# Altium PCB qol56-top(1).PcbDoc
Units mm, origin at the board's own origin, x right, y up, seen from the top; angles counter-clockwise.
Board outline 272 x 86 mm, 2 copper layers (F.Cu, B.Cu); 8 components, 0 nets, 8 pads, 0 vias.
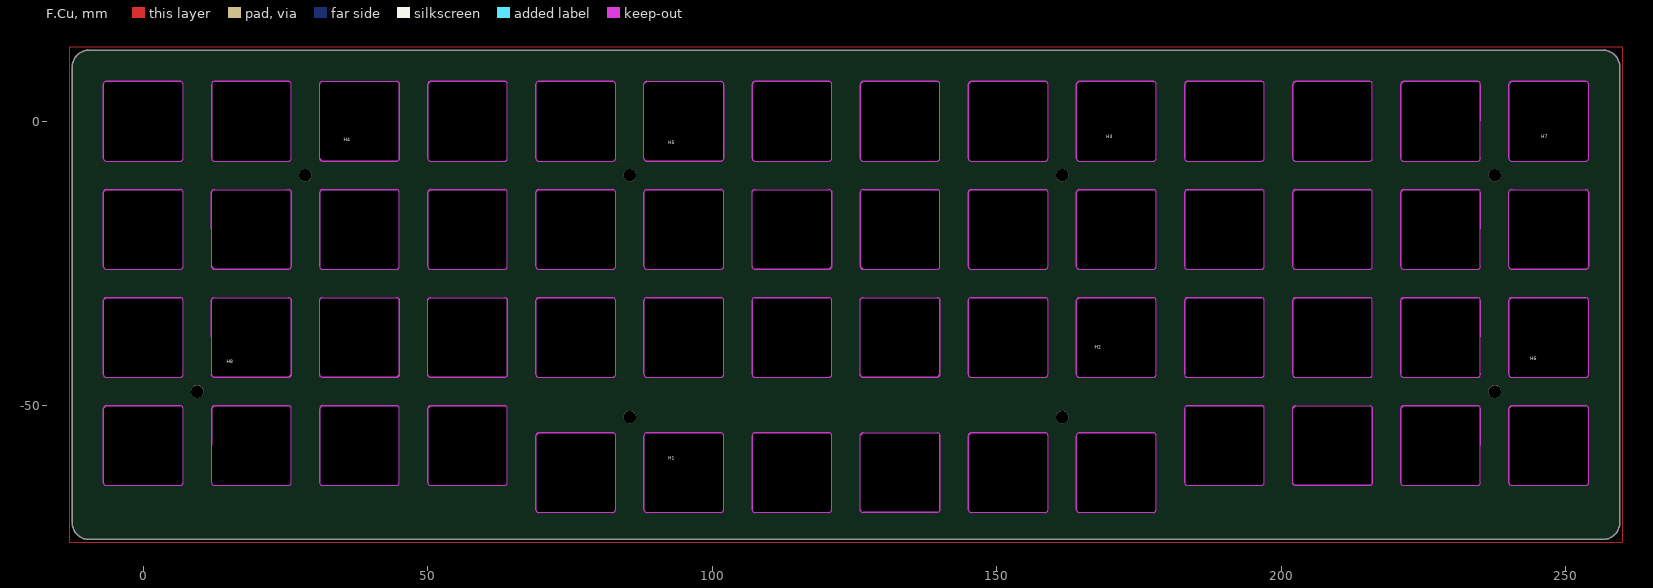
[diagram p0: F.Cu view]
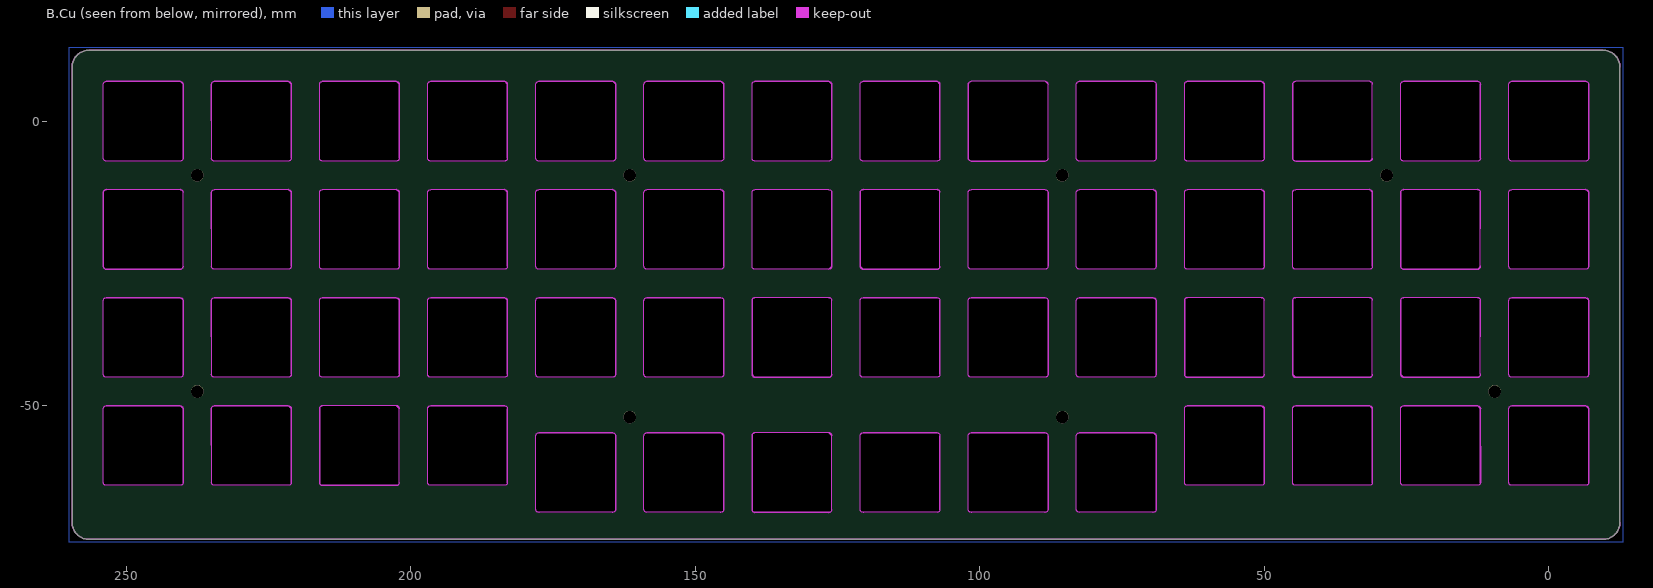
[diagram p1: B.Cu view, seen from below]

## Layer stack, top to bottom
F.Mask: solder mask 0.0102, Solder Resist, Dk 3.5
F.Cu: signal copper 0.0356
Dielectric 1: dielectric 0.32, FR-4, Dk 4.8
B.Cu: signal copper 0.0356
B.Mask: solder mask 0.0102, Solder Resist, Dk 3.5

## Board outline
259.5,-70.5 cw(c256.5,-70.5) 256.5,-73.5 -9.5,-73.5 cw(c-9.5,-70.5) -12.5,-70.5 -12.5,9.5 cw(c-9.5,9.5) -9.5,12.5 256.5,12.5 cw(c256.5,9.5) 259.5,9.5 259.5,-70.5
cut-out: 164.5,-30.99 164.305,-31.029 164.14,-31.14 164.029,-31.305 163.99,-31.5 164,-31.5 163.99,-44.5 164.029,-44.695 164.14,-44.86 164.305,-44.971 164.5,-45.01 164.5,-45 177.5,-45.01 177.695,-44.971 177.86,-44.86 177.971,-44.695 178.01,-44.5 178,-44.5 178.01,-31.5 177.971,-31.305 177.86,-31.14 177.695,-31.029 177.5,-30.99 177.5,-31 164.5,-30.99 164.305,-31.029 164.14,-31.14 164.029,-31.305 163.99,-31.5 164,-31.5
cut-out: 183.5,-30.99 183.305,-31.029 183.14,-31.14 183.029,-31.305 182.99,-31.5 183,-31.5 182.99,-44.5 183.029,-44.695 183.14,-44.86 183.305,-44.971 183.5,-45.01 183.5,-45 196.5,-45.01 196.695,-44.971 196.86,-44.86 196.971,-44.695 197.01,-44.5 197,-44.5 197.01,-31.5 196.971,-31.305 196.86,-31.14 196.695,-31.029 196.5,-30.99 196.5,-31 183.5,-30.99 183.305,-31.029 183.14,-31.14 183.029,-31.305 182.99,-31.5 183,-31.5
cut-out: -6.5,-49.99 -6.695,-50.029 -6.86,-50.14 -6.971,-50.305 -7.01,-50.5 -7,-50.5 -7.01,-63.5 -6.971,-63.695 -6.86,-63.86 -6.695,-63.971 -6.5,-64.01 -6.5,-64 6.5,-64.01 6.695,-63.971 6.86,-63.86 6.971,-63.695 7.01,-63.5 7,-63.5 7.01,-50.5 6.971,-50.305 6.86,-50.14 6.695,-50.029 6.5,-49.99 6.5,-50 -6.5,-49.99 -6.695,-50.029 -6.86,-50.14 -6.971,-50.305 -7.01,-50.5 -7,-50.5
cut-out: 202.5,-30.99 202.305,-31.029 202.14,-31.14 202.029,-31.305 201.99,-31.5 202,-31.5 201.99,-44.5 202.029,-44.695 202.14,-44.86 202.305,-44.971 202.5,-45.01 202.5,-45 215.5,-45.01 215.695,-44.971 215.86,-44.86 215.971,-44.695 216.01,-44.5 216,-44.5 216.01,-31.5 215.971,-31.305 215.86,-31.14 215.695,-31.029 215.5,-30.99 215.5,-31 202.5,-30.99 202.305,-31.029 202.14,-31.14 202.029,-31.305 201.99,-31.5 202,-31.5
cut-out: 221.5,-30.99 221.305,-31.029 221.14,-31.14 221.029,-31.305 220.99,-31.5 221,-31.5 220.99,-44.5 221.029,-44.695 221.14,-44.86 221.305,-44.971 221.5,-45.01 221.5,-45 234.5,-45.01 234.695,-44.971 234.86,-44.86 234.971,-44.695 235.01,-44.5 235,-44.5 235.01,-31.5 234.971,-31.305 234.86,-31.14 234.695,-31.029 234.5,-30.99 234.5,-31 221.5,-30.99 221.305,-31.029 221.14,-31.14 221.029,-31.305 220.99,-31.5 221,-31.5
cut-out: 240.5,-30.99 240.305,-31.029 240.14,-31.14 240.029,-31.305 239.99,-31.5 240,-31.5 239.99,-44.5 240.029,-44.695 240.14,-44.86 240.305,-44.971 240.5,-45.01 240.5,-45 253.5,-45.01 253.695,-44.971 253.86,-44.86 253.971,-44.695 254.01,-44.5 254,-44.5 254.01,-31.5 253.971,-31.305 253.86,-31.14 253.695,-31.029 253.5,-30.99 253.5,-31 240.5,-30.99 240.305,-31.029 240.14,-31.14 240.029,-31.305 239.99,-31.5 240,-31.5
cut-out: 221.5,-49.99 221.305,-50.029 221.14,-50.14 221.029,-50.305 220.99,-50.5 221,-50.5 220.99,-63.5 221.029,-63.695 221.14,-63.86 221.305,-63.971 221.5,-64.01 221.5,-64 234.5,-64.01 234.695,-63.971 234.86,-63.86 234.971,-63.695 235.01,-63.5 235,-63.5 235.01,-50.5 234.971,-50.305 234.86,-50.14 234.695,-50.029 234.5,-49.99 234.5,-50 221.5,-49.99 221.305,-50.029 221.14,-50.14 221.029,-50.305 220.99,-50.5 221,-50.5
cut-out: 240.5,-49.99 240.305,-50.029 240.14,-50.14 240.029,-50.305 239.99,-50.5 240,-50.5 239.99,-63.5 240.029,-63.695 240.14,-63.86 240.305,-63.971 240.5,-64.01 240.5,-64 253.5,-64.01 253.695,-63.971 253.86,-63.86 253.971,-63.695 254.01,-63.5 254,-63.5 254.01,-50.5 253.971,-50.305 253.86,-50.14 253.695,-50.029 253.5,-49.99 253.5,-50 240.5,-49.99 240.305,-50.029 240.14,-50.14 240.029,-50.305 239.99,-50.5 240,-50.5
cut-out: 201.99,-50.5 202.029,-50.305 202.14,-50.14 202.305,-50.029 202.5,-49.99 202.5,-50 215.5,-50 215.5,-49.99 215.695,-50.029 215.86,-50.14 215.971,-50.305 216.01,-50.5 216,-50.5 216.01,-63.5 215.971,-63.695 215.86,-63.86 215.695,-63.971 215.5,-64.01 215.5,-64 202.5,-64 202.5,-64.01 202.305,-63.971 202.14,-63.86 202.029,-63.695 201.99,-63.5 202,-63.5 201.99,-50.5 202.029,-50.305 202.14,-50.14 202.305,-50.029 202.5,-49.99 202.5,-50
cut-out: 140.01,-44.5 139.971,-44.695 139.86,-44.86 139.695,-44.971 139.5,-45.01 139.5,-45 126.5,-45 126.5,-45.01 126.305,-44.971 126.14,-44.86 126.029,-44.695 125.99,-44.5 126,-44.5 126,-31.5 125.99,-31.5 126.029,-31.305 126.14,-31.14 126.305,-31.029 126.5,-30.99 126.5,-31 139.5,-31 139.5,-30.99 139.695,-31.029 139.86,-31.14 139.971,-31.305 140.01,-31.5 140,-31.5 140.01,-44.5 139.971,-44.695 139.86,-44.86 139.695,-44.971 139.5,-45.01 139.5,-45
cut-out: 63.5,-30.99 63.695,-31.029 63.86,-31.14 63.971,-31.305 64.01,-31.5 64,-31.5 64.01,-44.5 63.971,-44.695 63.86,-44.86 63.695,-44.971 63.5,-45.01 50.5,-45 50.5,-45.01 50.305,-44.971 50.14,-44.86 50.029,-44.695 49.99,-44.5 50,-44.5 50,-31.5 49.99,-31.5 50.029,-31.305 50.14,-31.14 50.305,-31.029 50.5,-30.99 50.5,-31 63.5,-31
cut-out: 120.5,-31 107.5,-30.99 107.305,-31.029 107.14,-31.14 107.029,-31.305 106.99,-31.5 107,-44.5 106.99,-44.5 107.029,-44.695 107.14,-44.86 107.305,-44.971 107.5,-45.01 107.5,-45 120.5,-45 120.5,-45.01 120.695,-44.971 120.86,-44.86 120.971,-44.695 121.01,-44.5 121,-44.5 121,-31.5 121.01,-31.5 120.971,-31.305 120.86,-31.14 120.695,-31.029 120.5,-30.99
cut-out: 69.5,-30.99 69.305,-31.029 69.14,-31.14 69.029,-31.305 68.99,-31.5 69,-31.5 68.99,-44.5 69.029,-44.695 69.14,-44.86 69.305,-44.971 69.5,-45.01 69.5,-45 82.5,-45.01 82.695,-44.971 82.86,-44.86 82.971,-44.695 83.01,-44.5 83,-44.5 83.01,-31.5 82.971,-31.305 82.86,-31.14 82.695,-31.029 82.5,-30.99 82.5,-31 69.5,-30.99 69.305,-31.029 69.14,-31.14 69.029,-31.305 68.99,-31.5 69,-31.5
cut-out: 88.5,-45 101.5,-45 101.5,-45.01 101.695,-44.971 101.86,-44.86 101.971,-44.695 102.01,-44.5 102,-44.5 102.01,-31.5 101.971,-31.305 101.86,-31.14 101.695,-31.029 101.5,-30.99 101.5,-31 88.5,-30.99 88.305,-31.029 88.14,-31.14 88.029,-31.305 87.99,-31.5 88,-44.5 87.99,-44.5 88.029,-44.695 88.14,-44.86 88.305,-44.971 88.5,-45.01
cut-out: 197,-63.5 197.01,-50.5 196.971,-50.305 196.86,-50.14 196.695,-50.029 196.5,-49.99 196.5,-50 183.5,-49.99 183.305,-50.029 183.14,-50.14 183.029,-50.305 182.99,-50.5 183,-50.5 182.99,-63.5 183.029,-63.695 183.14,-63.86 183.305,-63.971 183.5,-64.01 196.5,-64 196.5,-64.01 196.695,-63.971 196.86,-63.86 196.971,-63.695 197.01,-63.5
cut-out: 159,-44.5 159.01,-31.5 158.971,-31.305 158.86,-31.14 158.695,-31.029 158.5,-30.99 158.5,-31 145.5,-30.99 145.305,-31.029 145.14,-31.14 145.029,-31.305 144.99,-31.5 145,-31.5 144.99,-44.5 145.029,-44.695 145.14,-44.86 145.305,-44.971 145.5,-45.01 158.5,-45 158.5,-45.01 158.695,-44.971 158.86,-44.86 158.971,-44.695 159.01,-44.5
cut-out: 12.5,-49.99 12.305,-50.029 12.14,-50.14 12.029,-50.305 11.99,-50.5 12,-50.5 11.99,-63.5 12.029,-63.695 12.14,-63.86 12.305,-63.971 12.5,-64.01 12.5,-64 25.5,-64.01 25.695,-63.971 25.86,-63.86 25.971,-63.695 26.01,-63.5 26,-63.5 26.01,-50.5 25.971,-50.305 25.86,-50.14 25.695,-50.029 25.5,-49.99 25.5,-50 12.5,-49.99 12.305,-50.029 12.14,-50.14 12.029,-50.305 11.99,-50.5 12,-50.5
cut-out: 31.5,-49.99 31.305,-50.029 31.14,-50.14 31.029,-50.305 30.99,-50.5 31,-50.5 30.99,-63.5 31.029,-63.695 31.14,-63.86 31.305,-63.971 31.5,-64.01 31.5,-64 44.5,-64.01 44.695,-63.971 44.86,-63.86 44.971,-63.695 45.01,-63.5 45,-63.5 45.01,-50.5 44.971,-50.305 44.86,-50.14 44.695,-50.029 44.5,-49.99 44.5,-50 31.5,-49.99 31.305,-50.029 31.14,-50.14 31.029,-50.305 30.99,-50.5 31,-50.5
cut-out: 50.5,-49.99 50.305,-50.029 50.14,-50.14 50.029,-50.305 49.99,-50.5 50,-50.5 49.99,-63.5 50.029,-63.695 50.14,-63.86 50.305,-63.971 50.5,-64.01 50.5,-64 63.5,-64.01 63.695,-63.971 63.86,-63.86 63.971,-63.695 64.01,-63.5 64,-63.5 64.01,-50.5 63.971,-50.305 63.86,-50.14 63.695,-50.029 63.5,-49.99 63.5,-50 50.5,-49.99 50.305,-50.029 50.14,-50.14 50.029,-50.305 49.99,-50.5 50,-50.5
cut-out: -6.5,-30.99 -6.695,-31.029 -6.86,-31.14 -6.971,-31.305 -7.01,-31.5 -7,-31.5 -7.01,-44.5 -6.971,-44.695 -6.86,-44.86 -6.695,-44.971 -6.5,-45.01 -6.5,-45 6.5,-45.01 6.695,-44.971 6.86,-44.86 6.971,-44.695 7.01,-44.5 7,-44.5 7.01,-31.5 6.971,-31.305 6.86,-31.14 6.695,-31.029 6.5,-30.99 6.5,-31 -6.5,-30.99 -6.695,-31.029 -6.86,-31.14 -6.971,-31.305 -7.01,-31.5 -7,-31.5
cut-out: 45.01,-44.5 44.971,-44.695 44.86,-44.86 44.695,-44.971 44.5,-45.01 44.5,-45 31.5,-45 31.5,-45.01 31.305,-44.971 31.14,-44.86 31.029,-44.695 30.99,-44.5 31,-44.5 31,-31.5 30.99,-31.5 31.029,-31.305 31.14,-31.14 31.305,-31.029 31.5,-30.99 31.5,-31 44.5,-31 44.5,-30.99 44.695,-31.029 44.86,-31.14 44.971,-31.305 45.01,-31.5 45,-31.5 45.01,-44.5 44.971,-44.695 44.86,-44.86 44.695,-44.971 44.5,-45.01 44.5,-45
cut-out: 145.5,-54.74 145.305,-54.779 145.14,-54.89 145.029,-55.055 144.99,-55.25 145,-55.25 144.99,-68.25 145.029,-68.445 145.14,-68.61 145.305,-68.721 145.5,-68.76 145.5,-68.75 158.5,-68.76 158.695,-68.721 158.86,-68.61 158.971,-68.445 159.01,-68.25 159,-68.25 159.01,-55.25 158.971,-55.055 158.86,-54.89 158.695,-54.779 158.5,-54.74 158.5,-54.75 145.5,-54.74 145.305,-54.779 145.14,-54.89 145.029,-55.055 144.99,-55.25 145,-55.25
cut-out: 177.5,-54.75 164.5,-54.74 164.305,-54.779 164.14,-54.89 164.029,-55.055 163.99,-55.25 164,-68.25 163.99,-68.25 164.029,-68.445 164.14,-68.61 164.305,-68.721 164.5,-68.76 164.5,-68.75 177.5,-68.75 177.5,-68.76 177.695,-68.721 177.86,-68.61 177.971,-68.445 178.01,-68.25 178,-68.25 178,-55.25 178.01,-55.25 177.971,-55.055 177.86,-54.89 177.695,-54.779 177.5,-54.74
cut-out: 125.99,-55.25 126.029,-55.055 126.14,-54.89 126.305,-54.779 126.5,-54.74 126.5,-54.75 139.5,-54.75 139.5,-54.74 139.695,-54.779 139.86,-54.89 139.971,-55.055 140.01,-55.25 140,-55.25 140.01,-68.25 139.971,-68.445 139.86,-68.61 139.695,-68.721 139.5,-68.76 139.5,-68.75 126.5,-68.75 126.5,-68.76 126.305,-68.721 126.14,-68.61 126.029,-68.445 125.99,-68.25 126,-68.25 125.99,-55.25 126.029,-55.055 126.14,-54.89 126.305,-54.779 126.5,-54.74 126.5,-54.75
cut-out: 69.5,-11.99 69.305,-12.029 69.14,-12.14 69.029,-12.305 68.99,-12.5 69,-12.5 68.99,-25.5 69.029,-25.695 69.14,-25.86 69.305,-25.971 69.5,-26.01 69.5,-26 82.5,-26.01 82.695,-25.971 82.86,-25.86 82.971,-25.695 83.01,-25.5 83,-25.5 83.01,-12.5 82.971,-12.305 82.86,-12.14 82.695,-12.029 82.5,-11.99 82.5,-12 69.5,-11.99 69.305,-12.029 69.14,-12.14 69.029,-12.305 68.99,-12.5 69,-12.5
cut-out: 121.01,-25.5 120.971,-25.695 120.86,-25.86 120.695,-25.971 120.5,-26.01 120.5,-26 107.5,-26.01 107.305,-25.971 107.14,-25.86 107.029,-25.695 106.99,-25.5 107,-12.5 106.99,-12.5 107.029,-12.305 107.14,-12.14 107.305,-12.029 107.5,-11.99 107.5,-12 120.5,-12 120.5,-11.99 120.695,-12.029 120.86,-12.14 120.971,-12.305 121.01,-12.5 121,-12.5 121.01,-25.5 120.971,-25.695 120.86,-25.86 120.695,-25.971 120.5,-26.01 120.5,-26
cut-out: 88,-55.25 88,-68.25 87.99,-68.25 88.029,-68.445 88.14,-68.61 88.305,-68.721 88.5,-68.76 88.5,-68.75 101.5,-68.75 101.5,-68.76 101.695,-68.721 101.86,-68.61 101.971,-68.445 102.01,-68.25 102,-68.25 102,-55.25 102.01,-55.25 101.971,-55.055 101.86,-54.89 101.695,-54.779 101.5,-54.74 101.5,-54.75 88.5,-54.75 88.5,-54.74 88.305,-54.779 88.14,-54.89 88.029,-55.055 87.99,-55.25
cut-out: 101.5,-12 88.5,-11.99 88.305,-12.029 88.14,-12.14 88.029,-12.305 87.99,-12.5 88,-25.5 87.99,-25.5 88.029,-25.695 88.14,-25.86 88.305,-25.971 88.5,-26.01 88.5,-26 101.5,-26 101.5,-26.01 101.695,-25.971 101.86,-25.86 101.971,-25.695 102.01,-25.5 102,-25.5 102,-12.5 102.01,-12.5 101.971,-12.305 101.86,-12.14 101.695,-12.029 101.5,-11.99
cut-out: 121,-68.25 121.01,-55.25 120.971,-55.055 120.86,-54.89 120.695,-54.779 120.5,-54.74 120.5,-54.75 107.5,-54.74 107.305,-54.779 107.14,-54.89 107.029,-55.055 106.99,-55.25 107,-55.25 106.99,-68.25 107.029,-68.445 107.14,-68.61 107.305,-68.721 107.5,-68.76 120.5,-68.75 120.5,-68.76 120.695,-68.721 120.86,-68.61 120.971,-68.445 121.01,-68.25
cut-out: 69.5,-54.74 69.305,-54.779 69.14,-54.89 69.029,-55.055 68.99,-55.25 69,-55.25 68.99,-68.25 69.029,-68.445 69.14,-68.61 69.305,-68.721 69.5,-68.76 69.5,-68.75 82.5,-68.76 82.695,-68.721 82.86,-68.61 82.971,-68.445 83.01,-68.25 83,-68.25 83.01,-55.25 82.971,-55.055 82.86,-54.89 82.695,-54.779 82.5,-54.74 82.5,-54.75 69.5,-54.74 69.305,-54.779 69.14,-54.89 69.029,-55.055 68.99,-55.25 69,-55.25
cut-out: 125.99,-25.5 126.029,-25.695 126.14,-25.86 126.305,-25.971 126.5,-26.01 126.5,-26 139.5,-26.01 139.695,-25.971 139.86,-25.86 139.971,-25.695 140.01,-25.5 140,-25.5 140.01,-12.5 139.971,-12.305 139.86,-12.14 139.695,-12.029 139.5,-11.99 126.5,-12 126.5,-11.99 126.305,-12.029 126.14,-12.14 126.029,-12.305 125.99,-12.5 126,-12.5 125.99,-25.5 126.029,-25.695 126.14,-25.86 126.305,-25.971 126.5,-26.01 126.5,-26
cut-out: 145.5,-11.99 145.305,-12.029 145.14,-12.14 145.029,-12.305 144.99,-12.5 145,-12.5 144.99,-25.5 145.029,-25.695 145.14,-25.86 145.305,-25.971 145.5,-26.01 145.5,-26 158.5,-26.01 158.695,-25.971 158.86,-25.86 158.971,-25.695 159.01,-25.5 159,-25.5 159.01,-12.5 158.971,-12.305 158.86,-12.14 158.695,-12.029 158.5,-11.99 158.5,-12 145.5,-11.99 145.305,-12.029 145.14,-12.14 145.029,-12.305 144.99,-12.5 145,-12.5
cut-out: 164.5,-11.99 164.305,-12.029 164.14,-12.14 164.029,-12.305 163.99,-12.5 164,-12.5 163.99,-25.5 164.029,-25.695 164.14,-25.86 164.305,-25.971 164.5,-26.01 164.5,-26 177.5,-26.01 177.695,-25.971 177.86,-25.86 177.971,-25.695 178.01,-25.5 178,-25.5 178.01,-12.5 177.971,-12.305 177.86,-12.14 177.695,-12.029 177.5,-11.99 177.5,-12 164.5,-11.99 164.305,-12.029 164.14,-12.14 164.029,-12.305 163.99,-12.5 164,-12.5
cut-out: 183.5,-11.99 183.305,-12.029 183.14,-12.14 183.029,-12.305 182.99,-12.5 183,-12.5 182.99,-25.5 183.029,-25.695 183.14,-25.86 183.305,-25.971 183.5,-26.01 183.5,-26 196.5,-26.01 196.695,-25.971 196.86,-25.86 196.971,-25.695 197.01,-25.5 197,-25.5 197.01,-12.5 196.971,-12.305 196.86,-12.14 196.695,-12.029 196.5,-11.99 196.5,-12 183.5,-11.99 183.305,-12.029 183.14,-12.14 183.029,-12.305 182.99,-12.5 183,-12.5
cut-out: 202.5,-11.99 202.305,-12.029 202.14,-12.14 202.029,-12.305 201.99,-12.5 202,-12.5 201.99,-25.5 202.029,-25.695 202.14,-25.86 202.305,-25.971 202.5,-26.01 202.5,-26 215.5,-26.01 215.695,-25.971 215.86,-25.86 215.971,-25.695 216.01,-25.5 216,-25.5 216.01,-12.5 215.971,-12.305 215.86,-12.14 215.695,-12.029 215.5,-11.99 215.5,-12 202.5,-11.99 202.305,-12.029 202.14,-12.14 202.029,-12.305 201.99,-12.5 202,-12.5
cut-out: 254.01,-25.5 253.971,-25.695 253.86,-25.86 253.695,-25.971 253.5,-26.01 253.5,-26 240.5,-26 240.5,-26.01 240.305,-25.971 240.14,-25.86 240.029,-25.695 239.99,-25.5 240,-25.5 240,-12.5 239.99,-12.5 240.029,-12.305 240.14,-12.14 240.305,-12.029 240.5,-11.99 240.5,-12 253.5,-12 253.5,-11.99 253.695,-12.029 253.86,-12.14 253.971,-12.305 254.01,-12.5 254,-12.5 254,-25.5
cut-out: 221.5,-11.99 221.305,-12.029 221.14,-12.14 221.029,-12.305 220.99,-12.5 221,-12.5 220.99,-25.5 221.029,-25.695 221.14,-25.86 221.305,-25.971 221.5,-26.01 221.5,-26 234.5,-26.01 234.695,-25.971 234.86,-25.86 234.971,-25.695 235.01,-25.5 235,-25.5 235.01,-12.5 234.971,-12.305 234.86,-12.14 234.695,-12.029 234.5,-11.99 234.5,-12 221.5,-11.99 221.305,-12.029 221.14,-12.14 221.029,-12.305 220.99,-12.5 221,-12.5
cut-out: 107.5,7.01 107.305,6.971 107.14,6.86 107.029,6.695 106.99,6.5 107,6.5 106.99,-6.5 107.029,-6.695 107.14,-6.86 107.305,-6.971 107.5,-7.01 107.5,-7 120.5,-7.01 120.695,-6.971 120.86,-6.86 120.971,-6.695 121.01,-6.5 121,-6.5 121.01,6.5 120.971,6.695 120.86,6.86 120.695,6.971 120.5,7.01 120.5,7 107.5,7.01 107.305,6.971 107.14,6.86 107.029,6.695 106.99,6.5 107,6.5
cut-out: 126.5,7.01 126.305,6.971 126.14,6.86 126.029,6.695 125.99,6.5 126,6.5 125.99,-6.5 126.029,-6.695 126.14,-6.86 126.305,-6.971 126.5,-7.01 126.5,-7 139.5,-7.01 139.695,-6.971 139.86,-6.86 139.971,-6.695 140.01,-6.5 140,-6.5 140.01,6.5 139.971,6.695 139.86,6.86 139.695,6.971 139.5,7.01 139.5,7 126.5,7.01 126.305,6.971 126.14,6.86 126.029,6.695 125.99,6.5 126,6.5
cut-out: 145.5,7.01 145.305,6.971 145.14,6.86 145.029,6.695 144.99,6.5 145,6.5 144.99,-6.5 145.029,-6.695 145.14,-6.86 145.305,-6.971 145.5,-7.01 145.5,-7 158.5,-7.01 158.695,-6.971 158.86,-6.86 158.971,-6.695 159.01,-6.5 159,-6.5 159.01,6.5 158.971,6.695 158.86,6.86 158.695,6.971 158.5,7.01 158.5,7 145.5,7.01 145.305,6.971 145.14,6.86 145.029,6.695 144.99,6.5 145,6.5
cut-out: 164.5,7.01 164.305,6.971 164.14,6.86 164.029,6.695 163.99,6.5 164,6.5 163.99,-6.5 164.029,-6.695 164.14,-6.86 164.305,-6.971 164.5,-7.01 164.5,-7 177.5,-7.01 177.695,-6.971 177.86,-6.86 177.971,-6.695 178.01,-6.5 178,-6.5 178.01,6.5 177.971,6.695 177.86,6.86 177.695,6.971 177.5,7.01 177.5,7 164.5,7.01 164.305,6.971 164.14,6.86 164.029,6.695 163.99,6.5 164,6.5
cut-out: 183.5,7.01 183.305,6.971 183.14,6.86 183.029,6.695 182.99,6.5 183,6.5 182.99,-6.5 183.029,-6.695 183.14,-6.86 183.305,-6.971 183.5,-7.01 183.5,-7 196.5,-7.01 196.695,-6.971 196.86,-6.86 196.971,-6.695 197.01,-6.5 197,-6.5 197.01,6.5 196.971,6.695 196.86,6.86 196.695,6.971 196.5,7.01 196.5,7 183.5,7.01 183.305,6.971 183.14,6.86 183.029,6.695 182.99,6.5 183,6.5
cut-out: 202.5,7.01 202.305,6.971 202.14,6.86 202.029,6.695 201.99,6.5 202,6.5 201.99,-6.5 202.029,-6.695 202.14,-6.86 202.305,-6.971 202.5,-7.01 202.5,-7 215.5,-7.01 215.695,-6.971 215.86,-6.86 215.971,-6.695 216.01,-6.5 216,-6.5 216.01,6.5 215.971,6.695 215.86,6.86 215.695,6.971 215.5,7.01 215.5,7 202.5,7.01 202.305,6.971 202.14,6.86 202.029,6.695 201.99,6.5 202,6.5
cut-out: 221.5,7.01 221.305,6.971 221.14,6.86 221.029,6.695 220.99,6.5 221,6.5 220.99,-6.5 221.029,-6.695 221.14,-6.86 221.305,-6.971 221.5,-7.01 221.5,-7 234.5,-7.01 234.695,-6.971 234.86,-6.86 234.971,-6.695 235.01,-6.5 235,-6.5 235.01,6.5 234.971,6.695 234.86,6.86 234.695,6.971 234.5,7.01 234.5,7 221.5,7.01 221.305,6.971 221.14,6.86 221.029,6.695 220.99,6.5 221,6.5
cut-out: 240.5,7.01 240.305,6.971 240.14,6.86 240.029,6.695 239.99,6.5 240,6.5 239.99,-6.5 240.029,-6.695 240.14,-6.86 240.305,-6.971 240.5,-7.01 240.5,-7 253.5,-7.01 253.695,-6.971 253.86,-6.86 253.971,-6.695 254.01,-6.5 254,-6.5 254.01,6.5 253.971,6.695 253.86,6.86 253.695,6.971 253.5,7.01 253.5,7 240.5,7.01 240.305,6.971 240.14,6.86 240.029,6.695 239.99,6.5 240,6.5
cut-out: -6.5,-11.99 -6.695,-12.029 -6.86,-12.14 -6.971,-12.305 -7.01,-12.5 -7,-12.5 -7.01,-25.5 -6.971,-25.695 -6.86,-25.86 -6.695,-25.971 -6.5,-26.01 -6.5,-26 6.5,-26.01 6.695,-25.971 6.86,-25.86 6.971,-25.695 7.01,-25.5 7,-25.5 7.01,-12.5 6.971,-12.305 6.86,-12.14 6.695,-12.029 6.5,-11.99 6.5,-12 -6.5,-11.99 -6.695,-12.029 -6.86,-12.14 -6.971,-12.305 -7.01,-12.5 -7,-12.5
cut-out: 12.5,-26.01 12.305,-25.971 12.14,-25.86 12.029,-25.695 11.99,-25.5 12,-25.5 11.99,-12.5 12.029,-12.305 12.14,-12.14 12.305,-12.029 12.5,-11.99 12.5,-12 25.5,-12 25.5,-11.99 25.695,-12.029 25.86,-12.14 25.971,-12.305 26.01,-12.5 26,-12.5 26.01,-25.5 25.971,-25.695 25.86,-25.86 25.695,-25.971 25.5,-26.01 25.5,-26 12.5,-26.01 12.305,-25.971 12.14,-25.86 12.029,-25.695 11.99,-25.5 12,-25.5
cut-out: 69,6.5 68.99,-6.5 69.029,-6.695 69.14,-6.86 69.305,-6.971 69.5,-7.01 69.5,-7 82.5,-7 82.5,-7.01 82.695,-6.971 82.86,-6.86 82.971,-6.695 83.01,-6.5 83,6.5 83.01,6.5 82.971,6.695 82.86,6.86 82.695,6.971 82.5,7.01 82.5,7 69.5,7 69.5,7.01 69.305,6.971 69.14,6.86 69.029,6.695 68.99,6.5
cut-out: 26,-6.5 26.01,6.5 25.971,6.695 25.86,6.86 25.695,6.971 25.5,7.01 25.5,7 12.5,7.01 12.305,6.971 12.14,6.86 12.029,6.695 11.99,6.5 12,6.5 12,-6.5 11.99,-6.5 12.029,-6.695 12.14,-6.86 12.305,-6.971 12.5,-7.01 12.5,-7 25.5,-7 25.5,-7.01 25.695,-6.971 25.86,-6.86 25.971,-6.695 26.01,-6.5
cut-out: 87.99,6.5 88.029,6.695 88.14,6.86 88.305,6.971 88.5,7.01 88.5,7 101.5,7 101.5,7.01 101.695,6.971 101.86,6.86 101.971,6.695 102.01,6.5 102,6.5 102.01,-6.5 101.971,-6.695 101.86,-6.86 101.695,-6.971 101.5,-7.01 101.5,-7 88.5,-7 88.5,-7.01 88.305,-6.971 88.14,-6.86 88.029,-6.695 87.99,-6.5 88,-6.5 87.99,6.5 88.029,6.695 88.14,6.86 88.305,6.971 88.5,7.01 88.5,7
cut-out: 31.5,-7.01 31.305,-6.971 31.14,-6.86 31.029,-6.695 30.99,-6.5 31,-6.5 31,6.5 30.99,6.5 31.029,6.695 31.14,6.86 31.305,6.971 31.5,7.01 31.5,7 44.5,7 44.5,7.01 44.695,6.971 44.86,6.86 44.971,6.695 45.01,6.5 45,6.5 45.01,-6.5 44.971,-6.695 44.86,-6.86 44.695,-6.971 44.5,-7.01 44.5,-7 31.5,-7.01 31.305,-6.971 31.14,-6.86 31.029,-6.695 30.99,-6.5 31,-6.5
cut-out: 26.01,-44.5 25.971,-44.695 25.86,-44.86 25.695,-44.971 25.5,-45.01 25.5,-45 12.5,-45 12.5,-45.01 12.305,-44.971 12.14,-44.86 12.029,-44.695 11.99,-44.5 12,-44.5 11.99,-31.5 12.029,-31.305 12.14,-31.14 12.305,-31.029 12.5,-30.99 12.5,-31 25.5,-31 25.5,-30.99 25.695,-31.029 25.86,-31.14 25.971,-31.305 26.01,-31.5 26,-31.5 26.01,-44.5 25.971,-44.695 25.86,-44.86 25.695,-44.971 25.5,-45.01 25.5,-45
cut-out: 31.5,-11.99 31.305,-12.029 31.14,-12.14 31.029,-12.305 30.99,-12.5 31,-12.5 30.99,-25.5 31.029,-25.695 31.14,-25.86 31.305,-25.971 31.5,-26.01 31.5,-26 44.5,-26.01 44.695,-25.971 44.86,-25.86 44.971,-25.695 45.01,-25.5 45,-25.5 45.01,-12.5 44.971,-12.305 44.86,-12.14 44.695,-12.029 44.5,-11.99 44.5,-12 31.5,-11.99 31.305,-12.029 31.14,-12.14 31.029,-12.305 30.99,-12.5 31,-12.5
cut-out: 50.5,-11.99 50.305,-12.029 50.14,-12.14 50.029,-12.305 49.99,-12.5 50,-12.5 49.99,-25.5 50.029,-25.695 50.14,-25.86 50.305,-25.971 50.5,-26.01 50.5,-26 63.5,-26.01 63.695,-25.971 63.86,-25.86 63.971,-25.695 64.01,-25.5 64,-25.5 64.01,-12.5 63.971,-12.305 63.86,-12.14 63.695,-12.029 63.5,-11.99 63.5,-12 50.5,-11.99 50.305,-12.029 50.14,-12.14 50.029,-12.305 49.99,-12.5 50,-12.5
cut-out: 6.5,7 -6.5,7.01 -6.695,6.971 -6.86,6.86 -6.971,6.695 -7.01,6.5 -7,6.5 -7,-6.5 -7.01,-6.5 -6.971,-6.695 -6.86,-6.86 -6.695,-6.971 -6.5,-7.01 6.5,-7 6.5,-7.01 6.695,-6.971 6.86,-6.86 6.971,-6.695 7.01,-6.5 7,6.5 7.01,6.5 6.971,6.695 6.86,6.86 6.695,6.971 6.5,7.01 6.5,7
cut-out: 50.5,7.01 50.305,6.971 50.14,6.86 50.029,6.695 49.99,6.5 50,6.5 49.99,-6.5 50.029,-6.695 50.14,-6.86 50.305,-6.971 50.5,-7.01 50.5,-7 63.5,-7.01 63.695,-6.971 63.86,-6.86 63.971,-6.695 64.01,-6.5 64,6.5 64.01,6.5 63.971,6.695 63.86,6.86 63.695,6.971 63.5,7.01 63.5,7 50.5,7.01 50.305,6.971 50.14,6.86 50.029,6.695 49.99,6.5 50,6.5

## Design rules (kind name [scope] priority, off if disabled: settings)
Clearance "Clearence 0.508_Polygon" [InNamedPolygon('F.Cu-') OR InNamedPolygon('B.Cu-')] p1: gap=0.508 ignorepadtopadclearanceinfootprint=FALSE
Clearance "Clearence 0.2_NetClass" [InNetClass('Default') OR InNetClass('VCC')] p2: gap=0.2 ignorepadtopadclearanceinfootprint=FALSE
HoleSize "Hole Size (Default)" [All] p1: absolutevalues=TRUE maxlimit=10 minlimit=0.3 maxpercent=80.000 minpercent=20.000
MinimumSolderMaskSliver [All] p1: minsoldermaskwidth=0
PolygonConnect Polygon_B.Cu-_ConnectDirect [IsNamedPolygon('B.Cu-') vs IsVia] p1: connectstyle=Direct reliefconductorwidth=0.254 reliefentries=4 polygonreliefangle="90 Angle" airgapwidth=0.254
PolygonConnect Polygon_B.Cu-_ConnectRelief45 [IsNamedPolygon('B.Cu-') vs (IsThruPin or IsSMTPin) and (PadShape_AllLayers = 'Round')] p2: connectstyle=Relief reliefconductorwidth=0.508 reliefentries=4 polygonreliefangle="45 Angle" airgapwidth=0.508
PolygonConnect Polygon_B.Cu-_ConnectRelief90 [IsNamedPolygon('B.Cu-') vs (IsThruPin or IsSMTPin) and (PadShape_AllLayers <> 'Round')] p3: connectstyle=Relief reliefconductorwidth=0.508 reliefentries=4 polygonreliefangle="90 Angle" airgapwidth=0.508
PolygonConnect Polygon_F.Cu-_ConnectDirect [IsNamedPolygon('F.Cu-') vs IsVia] p4: connectstyle=Direct reliefconductorwidth=0.254 reliefentries=4 polygonreliefangle="90 Angle" airgapwidth=0.254
PolygonConnect Polygon_F.Cu-_ConnectRelief45 [IsNamedPolygon('F.Cu-') vs (IsThruPin or IsSMTPin) and (PadShape_AllLayers = 'Round')] p5: connectstyle=Relief reliefconductorwidth=0.508 reliefentries=4 polygonreliefangle="45 Angle" airgapwidth=0.508
PolygonConnect Polygon_F.Cu-_ConnectRelief90 [IsNamedPolygon('F.Cu-') vs (IsThruPin or IsSMTPin) and (PadShape_AllLayers <> 'Round')] p6: connectstyle=Relief reliefconductorwidth=0.508 reliefentries=4 polygonreliefangle="90 Angle" airgapwidth=0.508
RoutingVias [All] p1: holewidth=0.711 width=1.27 viastyle="Through Hole" minholewidth=0.711 minwidth=1.27 maxholewidth=0.711 maxwidth=1.27
SilkToSilkClearance [All] p1: silktosilkclearance=0
SilkToSolderMaskClearance [IsPad] p1: minsilkscreentomaskgap=0 clearancetoexposedcopper=TRUE
SolderMaskExpansion [All] p1: expansion=0.102 istentingtop=FALSE
Width [All] p1: maxlimit=10 minlimit=0.2 preferedwidth=0.25 minimp=50.000000 maximp=50.000000 favimp=50.000000
26 further rules are at their usual default settings.

## Components (designator, comment, footprint, x,y, rotation, side; value= is the part's Value field where it differs from the comment)
H1 "MountingHole" MountingHole_2.2mm_M2 85.5,-52 r0 top
H2 "MountingHole" MountingHole_2.2mm_M2 161.5,-52 r0 top
H3 "MountingHole" MountingHole_2.2mm_M2 161.5,-9.5 r0 top
H4 "MountingHole" MountingHole_2.2mm_M2 28.5,-9.5 r0 top
H5 "MountingHole" MountingHole_2.2mm_M2 85.5,-9.5 r0 top
H6 "MountingHole" MountingHole_2.2mm_M2 237.5,-47.5 r0 top
H7 "MountingHole" MountingHole_2.2mm_M2 237.5,-9.5 r0 top
H8 "MountingHole" MountingHole_2.2mm_M2 9.5,-47.5 r0 top

## Footprints (in the part's own frame and the unit in brackets; to place one, negate y for a bottom-side part, rotate by r counter-clockwise, add the part's x,y. Pads: shape width x height; smd on the part's side, far side on the other; paste and mask are expansions set on the pad)
MountingHole_2.2mm_M2 [mm]
  round 2.2 hole 2.2 paste-2.2 mask+0.051: 1(0,0)

## Part data
H1 H2 H3 H4 H5 H6 H7 H8: library part MountingHole_2.2mm_M2, "Mounting Hole 2.2mm, no annular, M2"

## Nets (pads, with @x,y where several pads share a name; then routed paths per layer and width w, separated by ;. In a path a pad name is that pad's centre, name@x,y a point inside that pad or via, vN(x,y) a via of type N, cw(c..) or ccw(c..) an arc to the next point about the centre after c; other vN are vias at no path point)
pads on no net: H1.1 H2.1 H3.1 H4.1 H5.1 H6.1 H7.1 H8.1

## Polygon pours and split planes (outlines as drawn)
no net on F.Cu "F.Cu-" (solid, remove dead copper, pour order 0): 260,13 -13,13 -13,-74 260,-74
no net on B.Cu "B.Cu-" (solid, remove dead copper, pour order 1): 260,13 -13,13 -13,-74 260,-74

## Keep-outs
Edge.Cuts:
  lines w0.15: -12.5,-70.5 ccw(c-9.5,-70.5) -9.5,-73.5 ; -12.5,-70.5 ccw(c-9.5,-70.5) -9.5,-73.5 ; -12.5,-70.5 -12.5,9.5 ; -12.5,-70.5 -12.5,9.5 ; -12.5,9.5 cw(c-9.5,9.5) -9.5,12.5 ; -12.5,9.5 cw(c-9.5,9.5) -9.5,12.5 ; -9.5,-73.5 256.5,-73.5 ; -9.5,-73.5 256.5,-73.5 ; -9.5,12.5 256.5,12.5 ; -9.5,12.5 256.5,12.5 ; 256.5,-73.5 ccw(c256.5,-70.5) 259.5,-70.5 ; 256.5,-73.5 ccw(c256.5,-70.5) 259.5,-70.5 ; 256.5,12.5 cw(c256.5,9.5) 259.5,9.5 ; 256.5,12.5 cw(c256.5,9.5) 259.5,9.5 ; 259.5,-70.5 259.5,9.5 ; 259.5,-70.5 259.5,9.5
  lines w0.2: -7,-50.5 cw(c-6.5,-50.5) -6.5,-50 ; -7,-50.5 cw(c-6.5,-50.5) -6.5,-50 ; -7,-50.5 -7,-63.5 ccw(c-6.5,-63.5) -6.5,-64 6.5,-64 ccw(c6.5,-63.5) 7,-63.5 7,-50.5 ccw(c6.5,-50.5) 6.5,-50 -6.5,-50 ; -7,-31.5 cw(c-6.5,-31.5) -6.5,-31 ; -7,-31.5 cw(c-6.5,-31.5) -6.5,-31 ; -7,-31.5 -7,-44.5 ccw(c-6.5,-44.5) -6.5,-45 6.5,-45 ccw(c6.5,-44.5) 7,-44.5 7,-31.5 ccw(c6.5,-31.5) 6.5,-31 -6.5,-31 ; -7,-12.5 cw(c-6.5,-12.5) -6.5,-12 ; -7,-12.5 cw(c-6.5,-12.5) -6.5,-12 ; -7,-12.5 -7,-25.5 ccw(c-6.5,-25.5) -6.5,-26 6.5,-26 ccw(c6.5,-25.5) 7,-25.5 7,-12.5 ccw(c6.5,-12.5) 6.5,-12 -6.5,-12 ; 12,-50.5 cw(c12.5,-50.5) 12.5,-50 ; 12,-50.5 cw(c12.5,-50.5) 12.5,-50 ; 12,-50.5 12,-63.5 ccw(c12.5,-63.5) 12.5,-64 25.5,-64 ccw(c25.5,-63.5) 26,-63.5 26,-50.5 ccw(c25.5,-50.5) 25.5,-50 12.5,-50 ; 12,-25.5 ccw(c12.5,-25.5) 12.5,-26 ; 12,-25.5 ccw(c12.5,-25.5) 12.5,-26 ; 12,-25.5 12,-12.5 cw(c12.5,-12.5) 12.5,-12 25.5,-12 cw(c25.5,-12.5) 26,-12.5 26,-25.5 cw(c25.5,-25.5) 25.5,-26 12.5,-26 ; 25.5,-45 ccw(c25.5,-44.5) 26,-44.5 ; 25.5,-45 ccw(c25.5,-44.5) 26,-44.5 ; 25.5,-45 12.5,-45 cw(c12.5,-44.5) 12,-44.5 12,-31.5 cw(c12.5,-31.5) 12.5,-31 25.5,-31 cw(c25.5,-31.5) 26,-31.5 26,-44.5 ; 31,-50.5 cw(c31.5,-50.5) 31.5,-50 ; 31,-50.5 cw(c31.5,-50.5) 31.5,-50 ; 31,-50.5 31,-63.5 ccw(c31.5,-63.5) 31.5,-64 44.5,-64 ccw(c44.5,-63.5) 45,-63.5 45,-50.5 ccw(c44.5,-50.5) 44.5,-50 31.5,-50 ; 31,-12.5 cw(c31.5,-12.5) 31.5,-12 ; 31,-12.5 cw(c31.5,-12.5) 31.5,-12 ; 31,-12.5 31,-25.5 ccw(c31.5,-25.5) 31.5,-26 44.5,-26 ccw(c44.5,-25.5) 45,-25.5 45,-12.5 ccw(c44.5,-12.5) 44.5,-12 31.5,-12 ; 31,-6.5 ccw(c31.5,-6.5) 31.5,-7 ; 31,-6.5 ccw(c31.5,-6.5) 31.5,-7 ; 31,-6.5 31,6.5 cw(c31.5,6.5) 31.5,7 44.5,7 cw(c44.5,6.5) 45,6.5 45,-6.5 cw(c44.5,-6.5) 44.5,-7 31.5,-7 ; 44.5,-45 ccw(c44.5,-44.5) 45,-44.5 ; 44.5,-45 ccw(c44.5,-44.5) 45,-44.5 ; 44.5,-45 31.5,-45 cw(c31.5,-44.5) 31,-44.5 31,-31.5 cw(c31.5,-31.5) 31.5,-31 44.5,-31 cw(c44.5,-31.5) 45,-31.5 45,-44.5 ; 50,-50.5 cw(c50.5,-50.5) 50.5,-50 ; 50,-50.5 cw(c50.5,-50.5) 50.5,-50 ; 50,-50.5 50,-63.5 ccw(c50.5,-63.5) 50.5,-64 63.5,-64 ccw(c63.5,-63.5) 64,-63.5 64,-50.5 ccw(c63.5,-50.5) 63.5,-50 50.5,-50 ; 50,-12.5 cw(c50.5,-12.5) 50.5,-12 ; 50,-12.5 cw(c50.5,-12.5) 50.5,-12 ; 50,-12.5 50,-25.5 ccw(c50.5,-25.5) 50.5,-26 63.5,-26 ccw(c63.5,-25.5) 64,-25.5 64,-12.5 ccw(c63.5,-12.5) 63.5,-12 50.5,-12 ; 50,6.5 cw(c50.5,6.5) 50.5,7 ; 50,6.5 cw(c50.5,6.5) 50.5,7 ; 50,6.5 50,-6.5 ccw(c50.5,-6.5) 50.5,-7 63.5,-7 ccw(c63.5,-6.5) 64,-6.5 64,6.5 ccw(c63.5,6.5) 63.5,7 50.5,7 ; 69,-55.25 cw(c69.5,-55.25) 69.5,-54.75 ; 69,-55.25 cw(c69.5,-55.25) 69.5,-54.75 ; 69,-55.25 69,-68.25 ccw(c69.5,-68.25) 69.5,-68.75 82.5,-68.75 ccw(c82.5,-68.25) 83,-68.25 83,-55.25 ccw(c82.5,-55.25) 82.5,-54.75 69.5,-54.75 ; 69,-31.5 cw(c69.5,-31.5) 69.5,-31 ; 69,-31.5 cw(c69.5,-31.5) 69.5,-31 ; 69,-31.5 69,-44.5 ccw(c69.5,-44.5) 69.5,-45 82.5,-45 ccw(c82.5,-44.5) 83,-44.5 83,-31.5 ccw(c82.5,-31.5) 82.5,-31 69.5,-31 ; 69,-12.5 cw(c69.5,-12.5) 69.5,-12 ; 69,-12.5 cw(c69.5,-12.5) 69.5,-12 ; 69,-12.5 69,-25.5 ccw(c69.5,-25.5) 69.5,-26 82.5,-26 ccw(c82.5,-25.5) 83,-25.5 83,-12.5 ccw(c82.5,-12.5) 82.5,-12 69.5,-12 ; 88,6.5 cw(c88.5,6.5) 88.5,7 ; 88,6.5 cw(c88.5,6.5) 88.5,7 ; 88,6.5 88,-6.5 ccw(c88.5,-6.5) 88.5,-7 101.5,-7 ccw(c101.5,-6.5) 102,-6.5 102,6.5 ccw(c101.5,6.5) 101.5,7 88.5,7 ; 107,6.5 cw(c107.5,6.5) 107.5,7 ; 107,6.5 cw(c107.5,6.5) 107.5,7 ; 107,6.5 107,-6.5 ccw(c107.5,-6.5) 107.5,-7 120.5,-7 ccw(c120.5,-6.5) 121,-6.5 121,6.5 ccw(c120.5,6.5) 120.5,7 107.5,7 ; 120.5,-26 ccw(c120.5,-25.5) 121,-25.5 ; 120.5,-26 ccw(c120.5,-25.5) 121,-25.5 ; 120.5,-26 107.5,-26 cw(c107.5,-25.5) 107,-25.5 107,-12.5 cw(c107.5,-12.5) 107.5,-12 120.5,-12 cw(c120.5,-12.5) 121,-12.5 121,-25.5 ; 126,-55.25 cw(c126.5,-55.25) 126.5,-54.75 ; 126,-55.25 cw(c126.5,-55.25) 126.5,-54.75 ; 126,-55.25 126,-68.25 ccw(c126.5,-68.25) 126.5,-68.75 139.5,-68.75 ccw(c139.5,-68.25) 140,-68.25 140,-55.25 ccw(c139.5,-55.25) 139.5,-54.75 126.5,-54.75 ; 126,-25.5 ccw(c126.5,-25.5) 126.5,-26 ; 126,-25.5 ccw(c126.5,-25.5) 126.5,-26 ; 126,-25.5 126,-12.5 cw(c126.5,-12.5) 126.5,-12 139.5,-12 cw(c139.5,-12.5) 140,-12.5 140,-25.5 cw(c139.5,-25.5) 139.5,-26 126.5,-26 ; 126,6.5 cw(c126.5,6.5) 126.5,7 ; 126,6.5 cw(c126.5,6.5) 126.5,7 ; 126,6.5 126,-6.5 ccw(c126.5,-6.5) 126.5,-7 139.5,-7 ccw(c139.5,-6.5) 140,-6.5 140,6.5 ccw(c139.5,6.5) 139.5,7 126.5,7 ; 139.5,-45 ccw(c139.5,-44.5) 140,-44.5 ; 139.5,-45 ccw(c139.5,-44.5) 140,-44.5 ; 139.5,-45 126.5,-45 cw(c126.5,-44.5) 126,-44.5 126,-31.5 cw(c126.5,-31.5) 126.5,-31 139.5,-31 cw(c139.5,-31.5) 140,-31.5 140,-44.5 ; 145,-55.25 cw(c145.5,-55.25) 145.5,-54.75 ; 145,-55.25 cw(c145.5,-55.25) 145.5,-54.75 ; 145,-55.25 145,-68.25 ccw(c145.5,-68.25) 145.5,-68.75 158.5,-68.75 ccw(c158.5,-68.25) 159,-68.25 159,-55.25 ccw(c158.5,-55.25) 158.5,-54.75 145.5,-54.75 ; 145,-12.5 cw(c145.5,-12.5) 145.5,-12 ; 145,-12.5 cw(c145.5,-12.5) 145.5,-12 ; 145,-12.5 145,-25.5 ccw(c145.5,-25.5) 145.5,-26 158.5,-26 ccw(c158.5,-25.5) 159,-25.5 159,-12.5 ccw(c158.5,-12.5) 158.5,-12 145.5,-12 ; 145,6.5 cw(c145.5,6.5) 145.5,7 ; 145,6.5 cw(c145.5,6.5) 145.5,7 ; 145,6.5 145,-6.5 ccw(c145.5,-6.5) 145.5,-7 158.5,-7 ccw(c158.5,-6.5) 159,-6.5 159,6.5 ccw(c158.5,6.5) 158.5,7 145.5,7 ; 164,-31.5 cw(c164.5,-31.5) 164.5,-31 ; 164,-31.5 cw(c164.5,-31.5) 164.5,-31 ; 164,-31.5 164,-44.5 ccw(c164.5,-44.5) 164.5,-45 177.5,-45 ccw(c177.5,-44.5) 178,-44.5 178,-31.5 ccw(c177.5,-31.5) 177.5,-31 164.5,-31 ; 164,-12.5 cw(c164.5,-12.5) 164.5,-12 ; 164,-12.5 cw(c164.5,-12.5) 164.5,-12 ; 164,-12.5 164,-25.5 ccw(c164.5,-25.5) 164.5,-26 177.5,-26 ccw(c177.5,-25.5) 178,-25.5 178,-12.5 ccw(c177.5,-12.5) 177.5,-12 164.5,-12 ; 164,6.5 cw(c164.5,6.5) 164.5,7 ; 164,6.5 cw(c164.5,6.5) 164.5,7 ; 164,6.5 164,-6.5 ccw(c164.5,-6.5) 164.5,-7 177.5,-7 ccw(c177.5,-6.5) 178,-6.5 178,6.5 ccw(c177.5,6.5) 177.5,7 164.5,7 ; 183,-31.5 cw(c183.5,-31.5) 183.5,-31 ; 183,-31.5 cw(c183.5,-31.5) 183.5,-31 ; 183,-31.5 183,-44.5 ccw(c183.5,-44.5) 183.5,-45 196.5,-45 ccw(c196.5,-44.5) 197,-44.5 197,-31.5 ccw(c196.5,-31.5) 196.5,-31 183.5,-31 ; 183,-12.5 cw(c183.5,-12.5) 183.5,-12 ; 183,-12.5 cw(c183.5,-12.5) 183.5,-12 ; 183,-12.5 183,-25.5 ccw(c183.5,-25.5) 183.5,-26 196.5,-26 ccw(c196.5,-25.5) 197,-25.5 197,-12.5 ccw(c196.5,-12.5) 196.5,-12 183.5,-12 ; 183,6.5 cw(c183.5,6.5) 183.5,7 ; 183,6.5 cw(c183.5,6.5) 183.5,7 ; 183,6.5 183,-6.5 ccw(c183.5,-6.5) 183.5,-7 196.5,-7 ccw(c196.5,-6.5) 197,-6.5 197,6.5 ccw(c196.5,6.5) 196.5,7 183.5,7 ; 202,-50.5 cw(c202.5,-50.5) 202.5,-50 ; 202,-50.5 cw(c202.5,-50.5) 202.5,-50 ; 202,-50.5 202,-63.5 ccw(c202.5,-63.5) 202.5,-64 215.5,-64 ccw(c215.5,-63.5) 216,-63.5 216,-50.5 ccw(c215.5,-50.5) 215.5,-50 202.5,-50 ; 202,-31.5 cw(c202.5,-31.5) 202.5,-31 ; 202,-31.5 cw(c202.5,-31.5) 202.5,-31 ; 202,-31.5 202,-44.5 ccw(c202.5,-44.5) 202.5,-45 215.5,-45 ccw(c215.5,-44.5) 216,-44.5 216,-31.5 ccw(c215.5,-31.5) 215.5,-31 202.5,-31 ; 202,-12.5 cw(c202.5,-12.5) 202.5,-12 ; 202,-12.5 cw(c202.5,-12.5) 202.5,-12 ; 202,-12.5 202,-25.5 ccw(c202.5,-25.5) 202.5,-26 215.5,-26 ccw(c215.5,-25.5) 216,-25.5 216,-12.5 ccw(c215.5,-12.5) 215.5,-12 202.5,-12 ; 202,6.5 cw(c202.5,6.5) 202.5,7 ; 202,6.5 cw(c202.5,6.5) 202.5,7 ; 202,6.5 202,-6.5 ccw(c202.5,-6.5) 202.5,-7 215.5,-7 ccw(c215.5,-6.5) 216,-6.5 216,6.5 ccw(c215.5,6.5) 215.5,7 202.5,7 ; 221,-50.5 cw(c221.5,-50.5) 221.5,-50 ; 221,-50.5 cw(c221.5,-50.5) 221.5,-50 ; 221,-50.5 221,-63.5 ccw(c221.5,-63.5) 221.5,-64 234.5,-64 ccw(c234.5,-63.5) 235,-63.5 235,-50.5 ccw(c234.5,-50.5) 234.5,-50 221.5,-50 ; 221,-31.5 cw(c221.5,-31.5) 221.5,-31 ; 221,-31.5 cw(c221.5,-31.5) 221.5,-31 ; 221,-31.5 221,-44.5 ccw(c221.5,-44.5) 221.5,-45 234.5,-45 ccw(c234.5,-44.5) 235,-44.5 235,-31.5 ccw(c234.5,-31.5) 234.5,-31 221.5,-31 ; 221,-12.5 cw(c221.5,-12.5) 221.5,-12 ; 221,-12.5 cw(c221.5,-12.5) 221.5,-12 ; 221,-12.5 221,-25.5 ccw(c221.5,-25.5) 221.5,-26 234.5,-26 ccw(c234.5,-25.5) 235,-25.5 235,-12.5 ccw(c234.5,-12.5) 234.5,-12 221.5,-12 ; 221,6.5 cw(c221.5,6.5) 221.5,7 ; 221,6.5 cw(c221.5,6.5) 221.5,7 ; 221,6.5 221,-6.5 ccw(c221.5,-6.5) 221.5,-7 234.5,-7 ccw(c234.5,-6.5) 235,-6.5 235,6.5 ccw(c234.5,6.5) 234.5,7 221.5,7 ; 240,-50.5 cw(c240.5,-50.5) 240.5,-50 ; 240,-50.5 cw(c240.5,-50.5) 240.5,-50 ; 240,-50.5 240,-63.5 ccw(c240.5,-63.5) 240.5,-64 253.5,-64 ccw(c253.5,-63.5) 254,-63.5 254,-50.5 ccw(c253.5,-50.5) 253.5,-50 240.5,-50 ; 240,-31.5 cw(c240.5,-31.5) 240.5,-31 ; 240,-31.5 cw(c240.5,-31.5) 240.5,-31 ; 240,-31.5 240,-44.5 ccw(c240.5,-44.5) 240.5,-45 253.5,-45 ccw(c253.5,-44.5) 254,-44.5 254,-31.5 ccw(c253.5,-31.5) 253.5,-31 240.5,-31 ; 240,6.5 cw(c240.5,6.5) 240.5,7 ; 240,6.5 cw(c240.5,6.5) 240.5,7 ; 240,6.5 240,-6.5 ccw(c240.5,-6.5) 240.5,-7 253.5,-7 ccw(c253.5,-6.5) 254,-6.5 254,6.5 ccw(c253.5,6.5) 253.5,7 240.5,7 ; -7,-6.5 ccw(c-6.5,-6.5) -6.5,-7 6.5,-7 ccw(c6.5,-6.5) 7,-6.5 7,6.5 ccw(c6.5,6.5) 6.5,7 -6.5,7 ccw(c-6.5,6.5) -7,6.5 -7,-6.5 ; 12,-6.5 ccw(c12.5,-6.5) 12.5,-7 25.5,-7 ccw(c25.5,-6.5) 26,-6.5 26,6.5 ccw(c25.5,6.5) 25.5,7 12.5,7 ccw(c12.5,6.5) 12,6.5 12,-6.5 ; 50,-44.5 ccw(c50.5,-44.5) 50.5,-45 63.5,-45 ccw(c63.5,-44.5) 64,-44.5 64,-31.5 ccw(c63.5,-31.5) 63.5,-31 50.5,-31 ccw(c50.5,-31.5) 50,-31.5 50,-44.5 ; 69,-6.5 ccw(c69.5,-6.5) 69.5,-7 82.5,-7 ccw(c82.5,-6.5) 83,-6.5 83,6.5 ccw(c82.5,6.5) 82.5,7 69.5,7 ccw(c69.5,6.5) 69,6.5 69,-6.5 ; 88,-68.25 ccw(c88.5,-68.25) 88.5,-68.75 101.5,-68.75 ccw(c101.5,-68.25) 102,-68.25 102,-55.25 ccw(c101.5,-55.25) 101.5,-54.75 88.5,-54.75 ccw(c88.5,-55.25) 88,-55.25 88,-68.25 ; 88,-44.5 ccw(c88.5,-44.5) 88.5,-45 101.5,-45 ccw(c101.5,-44.5) 102,-44.5 102,-31.5 ccw(c101.5,-31.5) 101.5,-31 88.5,-31 ccw(c88.5,-31.5) 88,-31.5 88,-44.5 ; 88,-25.5 ccw(c88.5,-25.5) 88.5,-26 101.5,-26 ccw(c101.5,-25.5) 102,-25.5 102,-12.5 ccw(c101.5,-12.5) 101.5,-12 88.5,-12 ccw(c88.5,-12.5) 88,-12.5 88,-25.5 ; 107,-68.25 ccw(c107.5,-68.25) 107.5,-68.75 120.5,-68.75 ccw(c120.5,-68.25) 121,-68.25 121,-55.25 ccw(c120.5,-55.25) 120.5,-54.75 107.5,-54.75 ccw(c107.5,-55.25) 107,-55.25 107,-68.25 ; 107,-44.5 ccw(c107.5,-44.5) 107.5,-45 120.5,-45 ccw(c120.5,-44.5) 121,-44.5 121,-31.5 ccw(c120.5,-31.5) 120.5,-31 107.5,-31 ccw(c107.5,-31.5) 107,-31.5 107,-44.5 ; 145,-44.5 ccw(c145.5,-44.5) 145.5,-45 158.5,-45 ccw(c158.5,-44.5) 159,-44.5 159,-31.5 ccw(c158.5,-31.5) 158.5,-31 145.5,-31 ccw(c145.5,-31.5) 145,-31.5 145,-44.5 ; 164,-68.25 ccw(c164.5,-68.25) 164.5,-68.75 177.5,-68.75 ccw(c177.5,-68.25) 178,-68.25 178,-55.25 ccw(c177.5,-55.25) 177.5,-54.75 164.5,-54.75 ccw(c164.5,-55.25) 164,-55.25 164,-68.25 ; 183,-63.5 ccw(c183.5,-63.5) 183.5,-64 196.5,-64 ccw(c196.5,-63.5) 197,-63.5 197,-50.5 ccw(c196.5,-50.5) 196.5,-50 183.5,-50 ccw(c183.5,-50.5) 183,-50.5 183,-63.5 ; 240,-25.5 ccw(c240.5,-25.5) 240.5,-26 253.5,-26 ccw(c253.5,-25.5) 254,-25.5 254,-12.5 ccw(c253.5,-12.5) 253.5,-12 240.5,-12 ccw(c240.5,-12.5) 240,-12.5 240,-25.5

## Silkscreen, mask and mechanical layers (free items; w line width, h text height)
F.Mask:
  text "QOL56 @eswai 2019" at 5.93,-69.111 h1.7

## Dimensions
260,-73.5 to 260,12.5 on Dwgs.User
259.5,13 to -12.5,13 on Dwgs.User